# Altium PCB TLV3501.PcbDoc
Units mil, origin at the board's own origin, x right, y up, seen from the top; angles counter-clockwise.
Board outline 2825 x 2920 mil, 2 copper layers (Top Layer, Bottom Layer); 48 components, 22 nets, 121 pads, 235 vias.
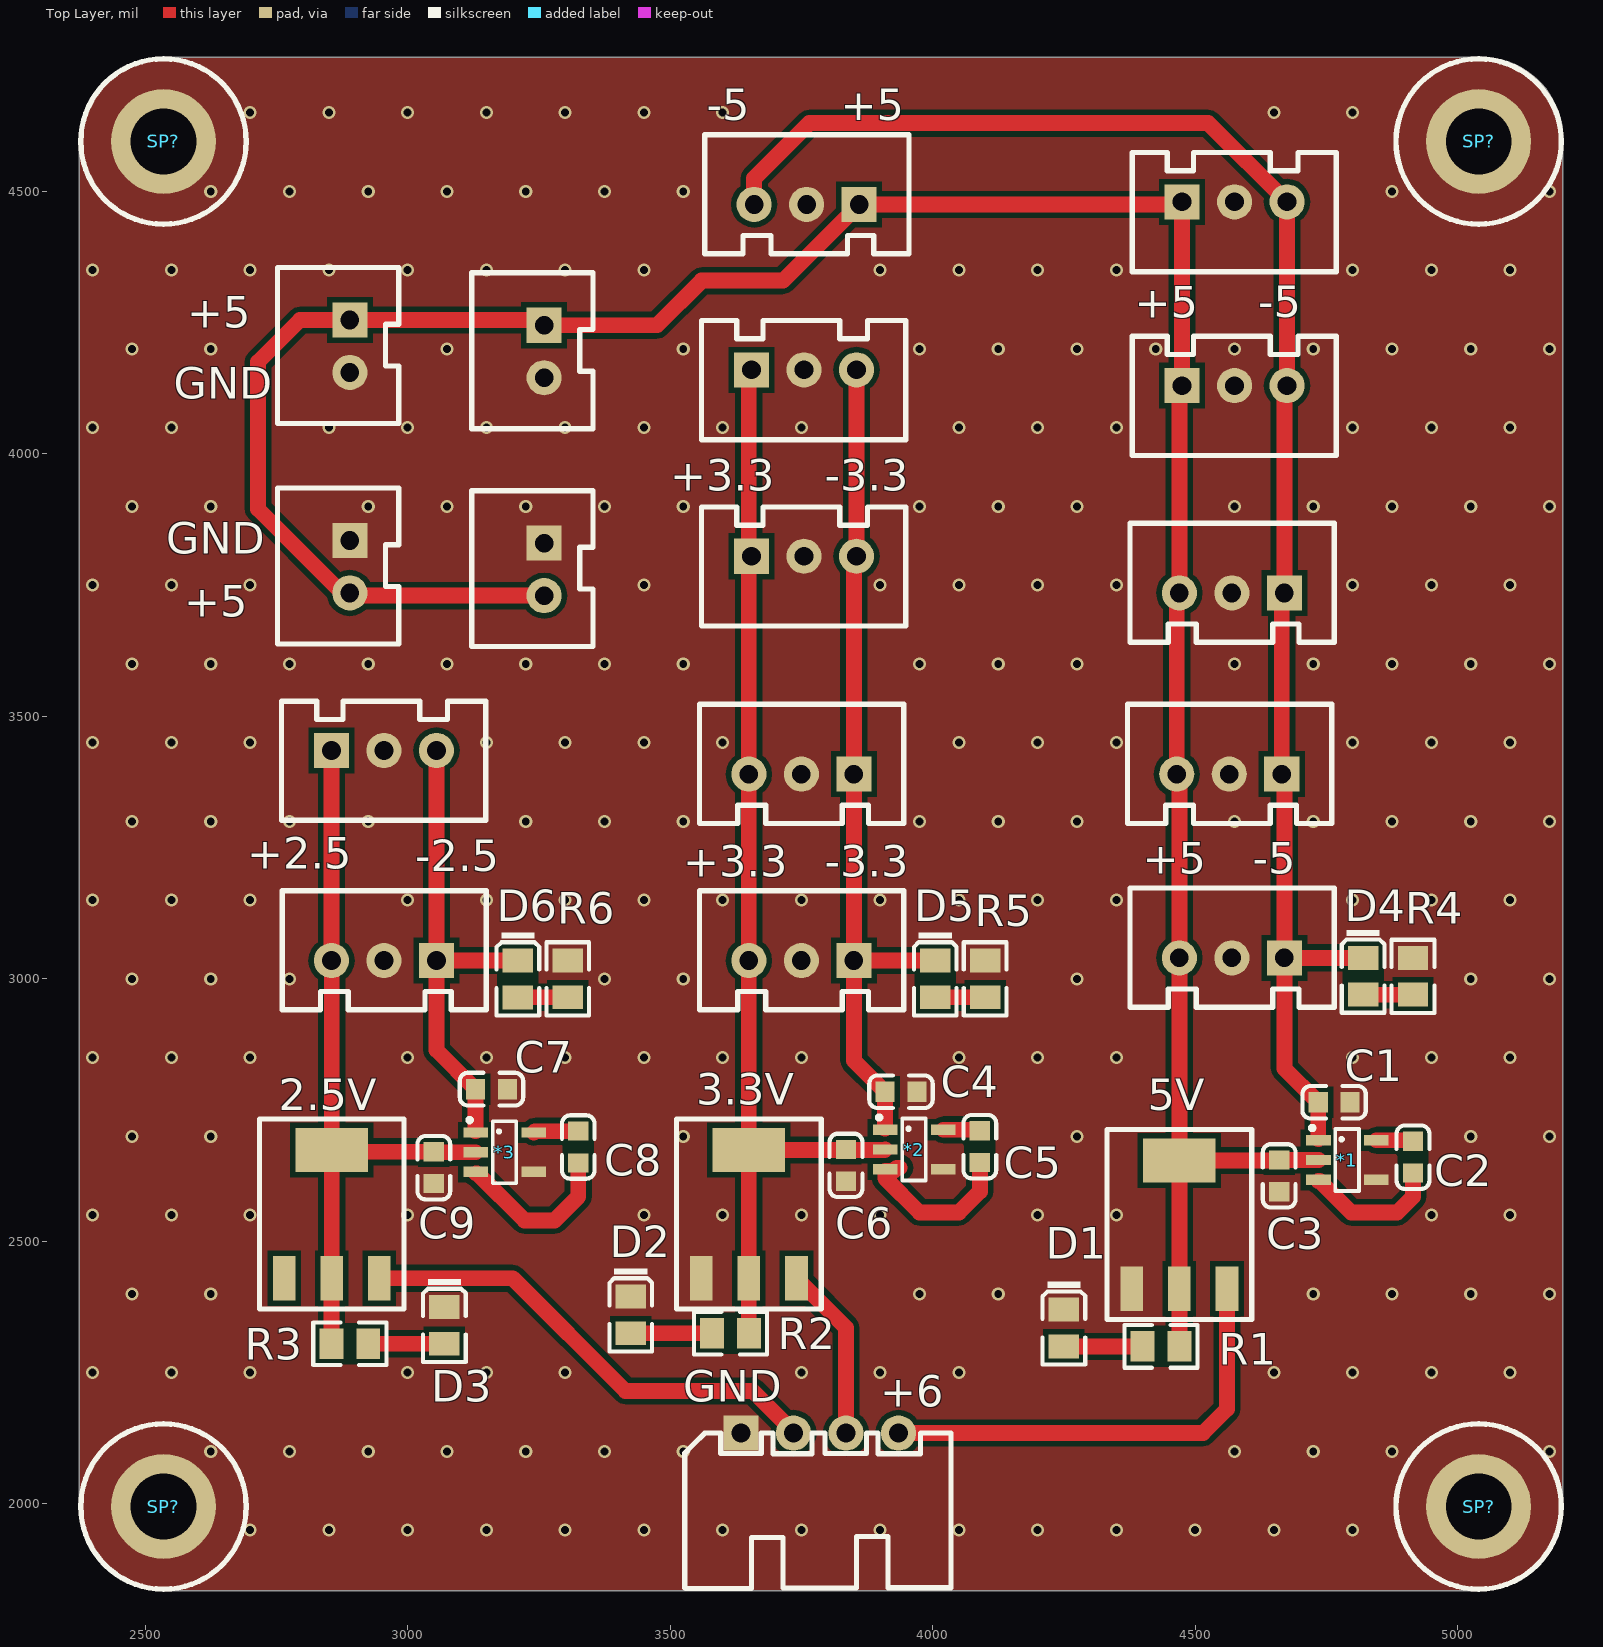
[diagram p0: Top Layer view]
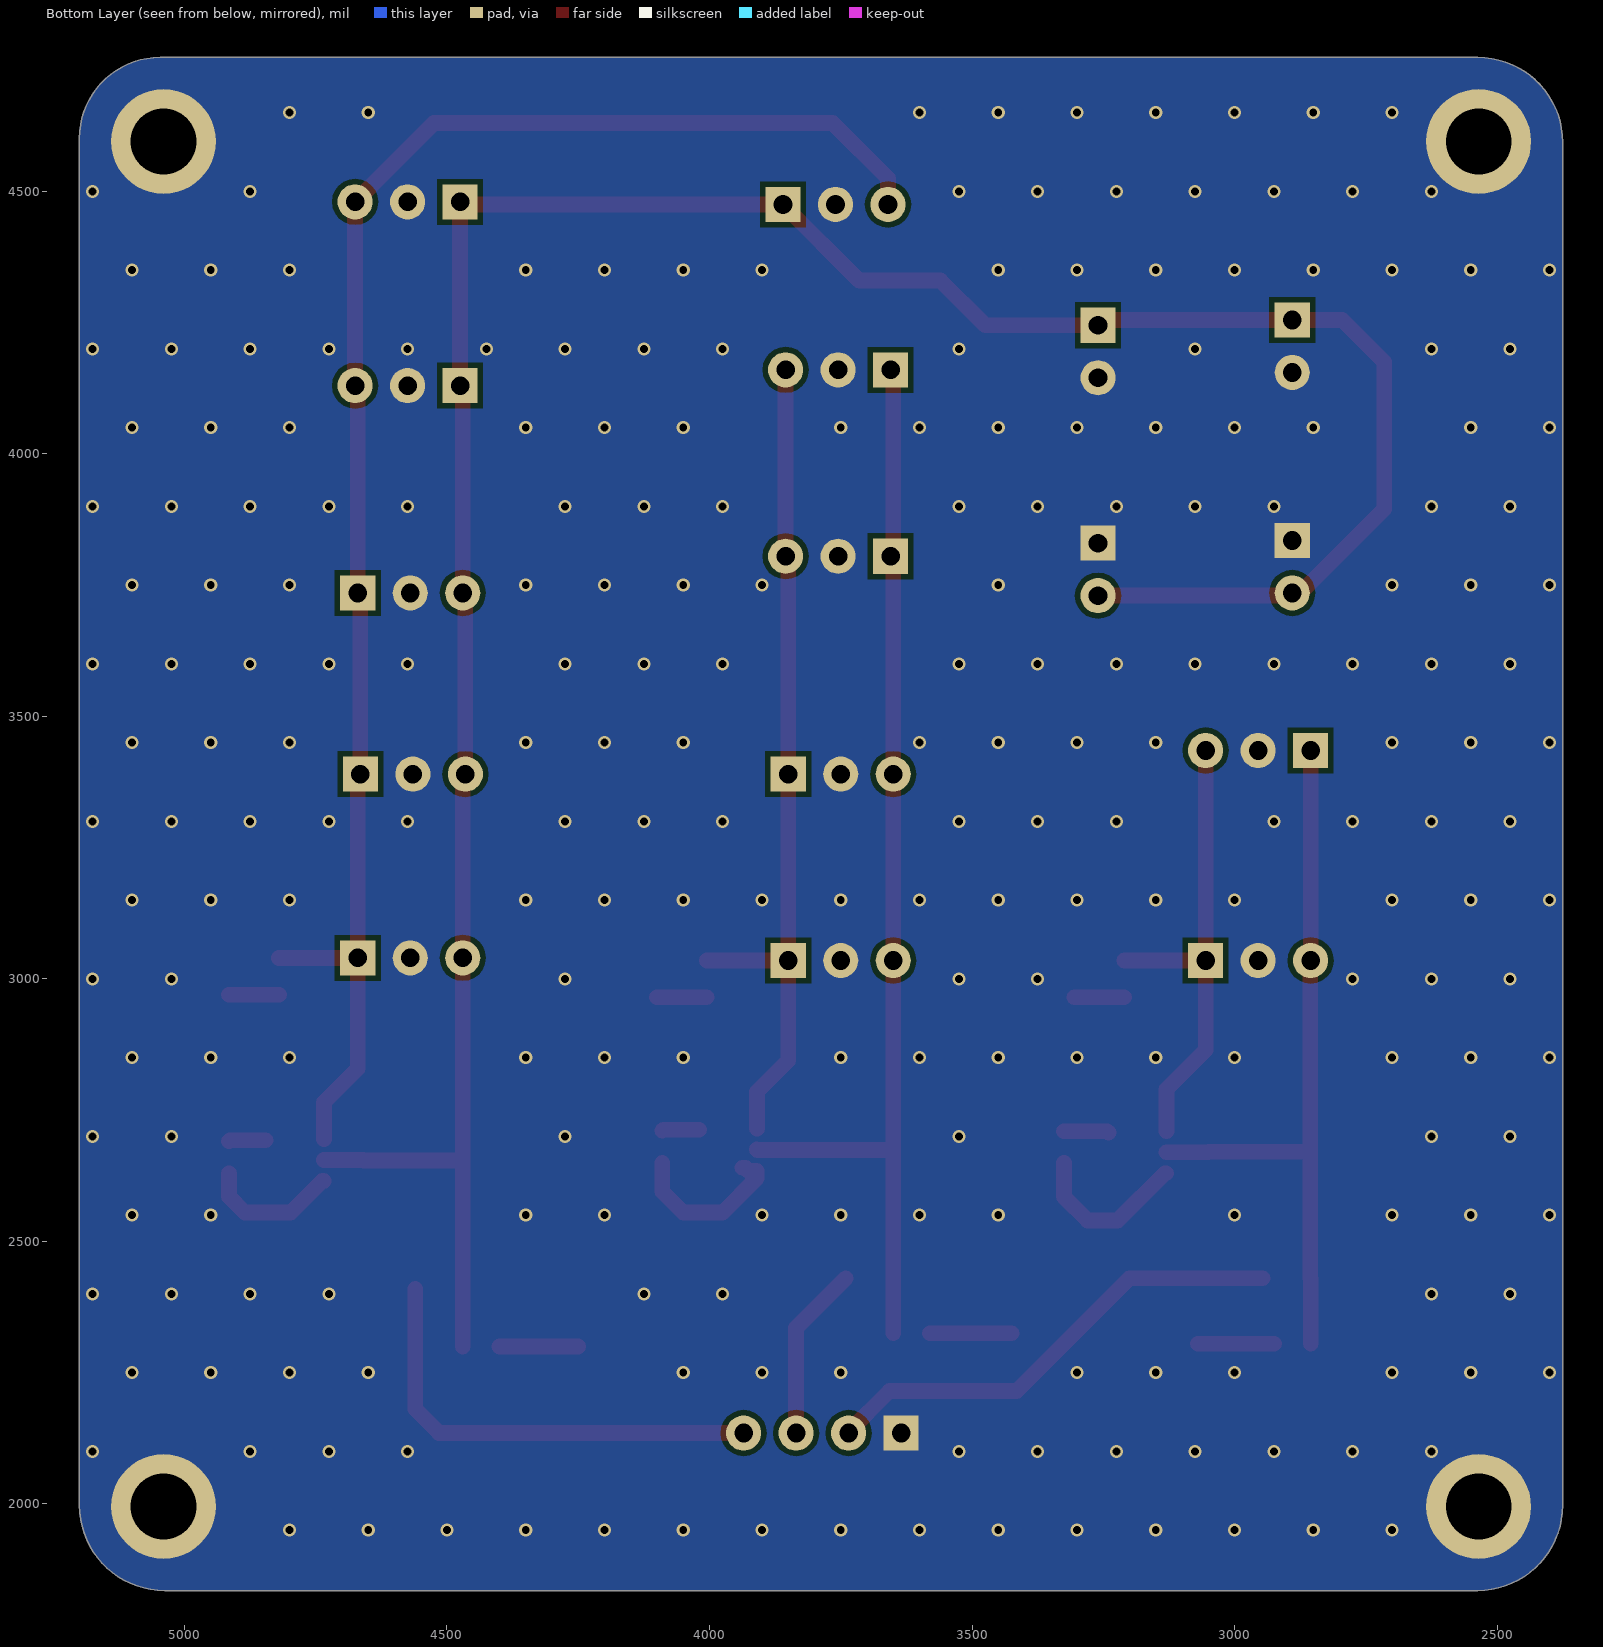
[diagram p1: Bottom Layer view, seen from below]
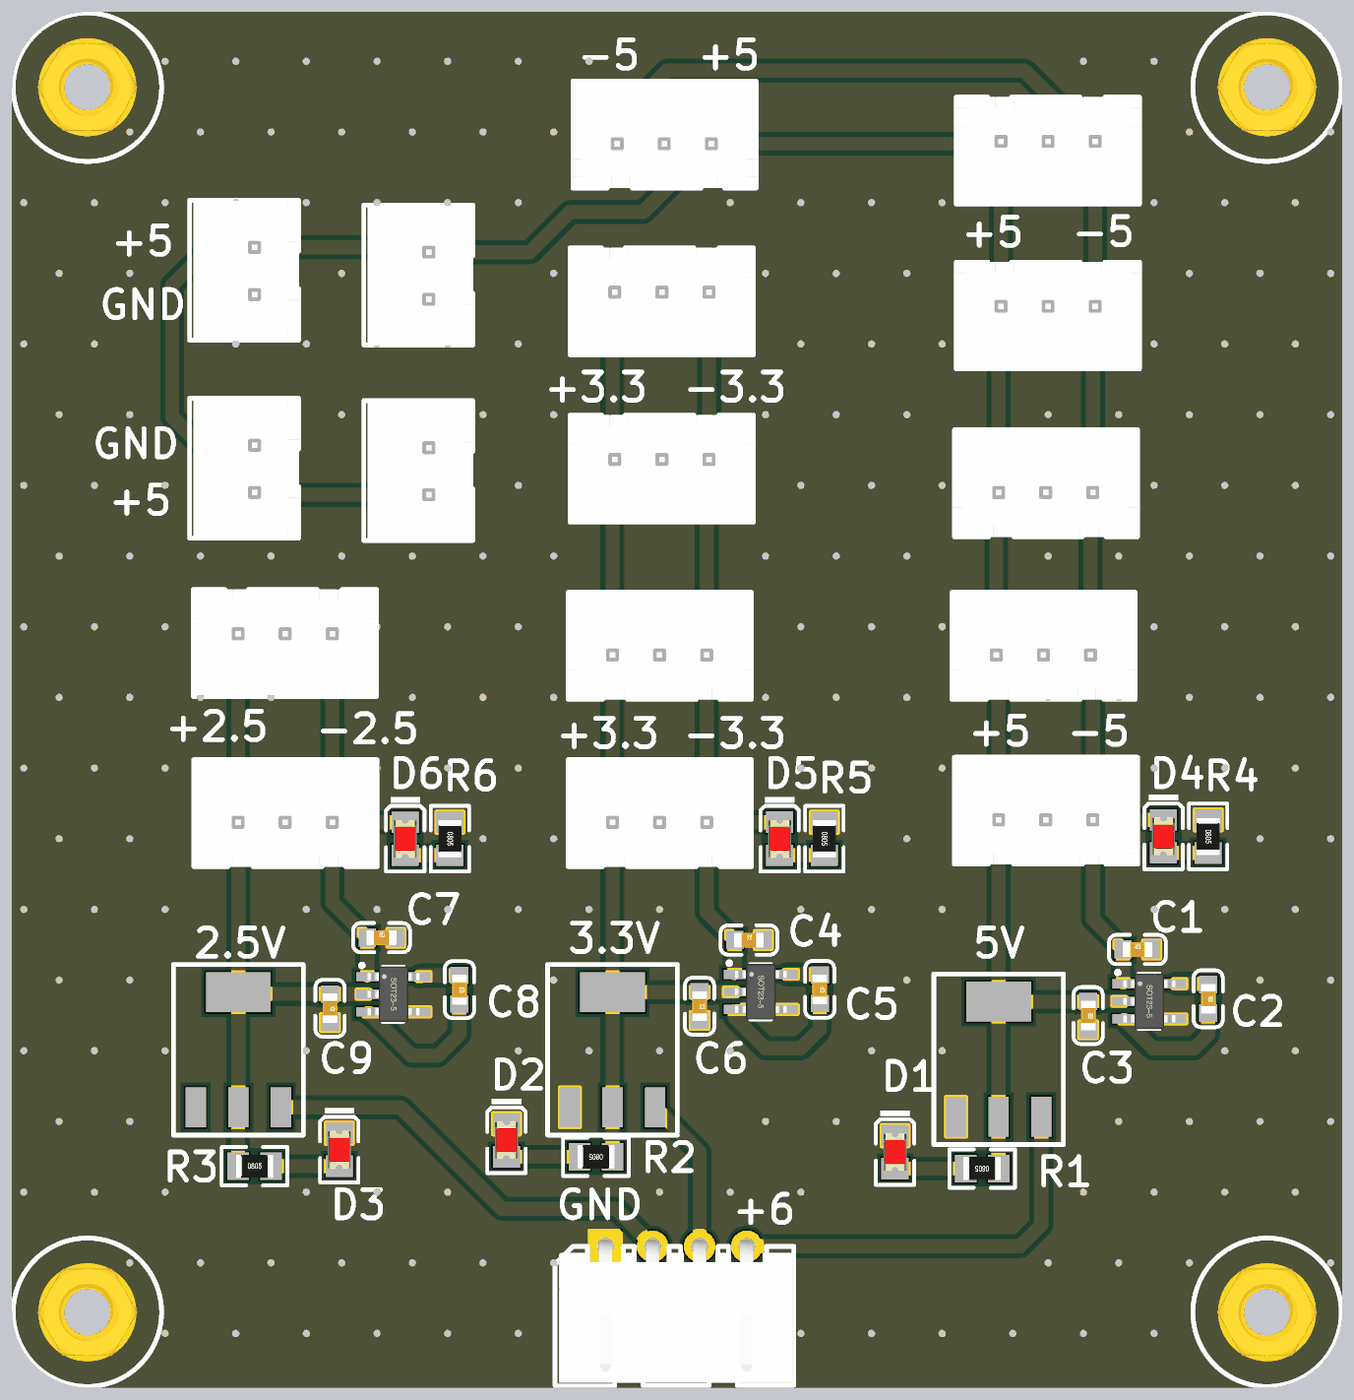
[diagram p2: 3D render of the assembled board from above, using the file's embedded part models]

## Layer stack, top to bottom
Top Solder: solder mask 0.4, Solder Resist, Dk 3.5
Top Layer: signal copper 1.4
Dielectric 1: dielectric 12.6, FR-4, Dk 4.8
Bottom Layer: signal copper 1.4
Bottom Solder: solder mask 0.4, Solder Resist, Dk 3.5

## Board outline
2375,1997.08 2375,4593.67 cw(c2536.33,4593.67) 2536.33,4755 5046.36,4755 cw(c5046.36,4601.36) 5200,4601.36 5200,1997.08 cw(c5037.92,1997.08) 5037.92,1835 2537.08,1835 cw(c2537.08,1997.08)

## Design rules (kind name [scope] priority, off if disabled: settings)
Clearance [All] p1: gap=10 ignorepadtopadclearanceinfootprint=FALSE except(0: Arc-Hole Track-Hole SMDPad-Hole THPad-Hole Via-Hole Fill-Hole Poly-Hole Region-Hole Text-Hole)
PolygonConnect [All] p1: connectstyle=Direct reliefconductorwidth=10 reliefentries=4 polygonreliefangle="90 Angle" airgapwidth=10
RoutingVias [All] p1: holewidth=28 width=50 viastyle="Through Hole" minholewidth=28 minwidth=50 maxholewidth=28 maxwidth=50
SolderMaskExpansion [All] p1: expansion=4
Width [All] p1: maxlimit=50 minlimit=10 preferedwidth=10 minimp=50.000000 maximp=50.000000 favimp=50.000000
30 further rules are at their usual default settings.

## Classes and differential pairs
component class Sheet1: 2.5V 3.3V 5V *1 *2 *3 +2.5 +3.3 +5 -2.5 -3.3 -5 C1 C2 C3 C4 C5 C6 C7 C8 C9 D1 D2 D3 D4 D5 D6 GND R1 R2 R3 R4 R5 R6 SP?

## Components (designator, comment, footprint, x,y, rotation, side; value= is the part's Value field where it differs from the comment)
2.5V "LM1117" 1117 2765,2430 r0 top (schematic designator U3)
3.3V "LM1117" 1117 3559.45,2430 r0 top (schematic designator U2)
5V "LM1117" 1117 4379.45,2410 r0 top (schematic designator U1)
*1 "Component_1" SOT23-5N 4790,2655 r270 top
*2 "Component_1" SOT23-5N 3965,2675 r270 top
*3 "Component_1" SOT23-5N 3185,2670 r270 top
+2.5 "HDR-1X3" XH2.54-LI-3P 2955,3035 r180 top (schematic designator JP16)
+3.3 "HDR-1X3" XH2.54-LI-3P 3755,3805 r0 top (schematic designator JP11)
+3.3 "HDR-1X3" XH2.54-LI-3P 3750,3035 r180 top (schematic designator JP3)
+5 "HDR-1X3" XH2.54-LI-3P 4570,3040 r180 top (schematic designator JP14)
+5 "HDR-1X3" XH2.54-LI-3P 4575,4130 r0 top (schematic designator JP9)
+5 "HDR-1X2" XH2.54-LI-2P 2890,4205 r270 top (schematic designator JP6)
+5 "HDR-1X2" XH2.54-LI-2P 2890,3785 r270 top (schematic designator JP5)
+5 "HDR-1X3" XH2.54-LI-3P 3755,4160 r0 top (schematic designator JP4)
-2.5 "HDR-1X3" XH2.54-LI-3P 2955,3435 r0 top (schematic designator JP17)
-3.3 "HDR-1X3" XH2.54-LI-3P 3750,3390 r180 top (schematic designator JP10)
-3.3 "HDR-1X3" XH2.54-LI-3P 4575,4480 r0 top (schematic designator JP2)
-5 "HDR-1X3" XH2.54-LI-3P 3760,4475 r180 top (schematic designator JP15)
-5 "HDR-1X3" XH2.54-LI-3P 4565,3390 r180 top (schematic designator JP8)
-5 "HDR-1X3" XH2.54-LI-3P 4570,3735 r180 top (schematic designator JP1)
C1 "6pF (6R0) 0.25pF 50V" 0603_C 4764.69,2765 r0 top
C2 "6pF (6R0) 0.25pF 50V" 0603_C 4915,2660.32 r270 top
C3 "(6R0) 0.25pF 50V" 0603_C 4660,2624.68 r270 top
C4 "6pF (6R0) 0.25pF 50V" 0603_C 3939.68,2785 r0 top
C5 "6pF (6R0) 0.25pF 50V" 0603_C 4090,2680.32 r270 top
C6 "(6R0) 0.25pF 50V" 0603_C 3835,2644.68 r270 top
C7 "6pF (6R0) 0.25pF 50V" 0603_C 3159.68,2790 r0 top
C8 "6pF (6R0) 0.25pF 50V" 0603_C 3325,2679.68 r270 top
C9 "(6R0) 0.25pF 50V" 0603_C 3050,2640.32 r270 top
D1 "黄灯 0805" 0805_LED_S1 4250,2334.96 r270 top
D2 "黄灯 0805" 0805_LED_S1 3425,2360.04 r270 top
D3 "黄灯 0805" 0805_LED_S1 3070,2340.04 r270 top
D4 "黄灯 0805" 0805_LED_S1 4820,3005.04 r270 top
D5 "黄灯 0805" 0805_LED_S1 4005,3000.04 r270 top
D6 "黄灯 0805" 0805_LED_S1 3210,2999.96 r270 top
GND "HDR-1X2" XH2.54-LI-2P 3260,4195 r270 top (schematic designator JP13)
GND "HDR-1X2" XH2.54-LI-2P 3260,3780 r270 top (schematic designator JP12)
GND "HDR-1X4" XH2.54-WI-4P 3785,2135 r0 top (schematic designator JP7)
R1 "1.8KΩ (1801) ±1%" 0805_R 4435.04,2300 r180 top
R2 "1.8KΩ (1801) ±1%" 0805_R 3615.04,2325 r180 top
R3 "1.8KΩ (1801) ±1%" 0805_R 2889.96,2305 r0 top
R4 "1.8KΩ (1801) ±1%" 0805_R 4915,3004.96 r270 top
R5 "1.8KΩ (1801) ±1%" 0805_R 4100,3000.04 r270 top
R6 "1.8KΩ (1801) ±1%" 0805_R 3305,3000.04 r270 top
SP? "M3铜柱" M3x4_L 5040,4595 r0 top
SP? "M3铜柱" M3x4_L 5040,1995 r0 top
SP? "M3铜柱" M3x4_L 2535,4595 r0 top
SP? "M3铜柱" M3x4_L 2535,1995 r0 top

## Footprints (in the part's own frame and the unit in brackets; to place one, negate y for a bottom-side part, rotate by r counter-clockwise, add the part's x,y. Pads: shape width x height; smd on the part's side, far side on the other; paste and mask are expansions set on the pad)
0603_C [mm]
  rect 0.93x0.98 smd: 1(-0.77,0) 2(0.77,0)
  silkscreen extent -1.53,-0.79 1.54,0.79, body extent -0.8,-0.4 0.8,0.4, height 0.3
0805_LED_S1 [mm]
  rect 1.16x1.47 smd: A(0.89,0) K(-0.89,0)
  silkscreen extent -2.25,-1.04 1.77,1.03, body extent -1.01,-0.62 1.01,0.62, height 1.1
0805_R [mm]
  rect 1.16x1.47 smd: 1(-0.89,0) 2(0.89,0)
  silkscreen extent -1.77,-1.04 1.77,1.03, body extent -1,-0.62 1,0.63, height 0.49
1117 [mm]
  rect 1.1x2.15 smd: 1(0,0) 2(2.3,0) 3(4.6,0)
  rect 3.5x2.15 smd: 2(2.3,6.2)
  silkscreen extent -1.2,-1.5 5.8,7.7
M3x4_L [mil] "M3铜柱，长：4mm"
  round 200 hole 125: 1(0,0)
  silkscreen extent -157,-157 157,157, body extent -106,-93 106,93, height 159
SOT23-5N [mm] "3x1.6x1.1mm(长宽高)"
  rect 0.5x1.2 smd: 1(-0.95,-1.4) 2(0,-1.4) 3(0.95,-1.4) 4(0.95,1.4) 5(-0.95,1.4)
  silkscreen extent -1.63,-1.78 1.5,0.56, body extent -1.5,-1.4 1.5,1.4, height 1.15
XH2.54-LI-2P [mm] "接插件，2P"
  rect 1.7x1.7 hole 0.9: 1(-1.27,0)
  round 1.7 hole 0.9: 2(1.27,0)
  silkscreen extent -3.81,-3.51 3.74,2.37, body extent -3.77,-3.3 3.77,2.4, height 7.05
XH2.54-LI-3P [mm] "接插件，3P"
  rect 1.7x1.7 hole 0.9: 1(-2.54,0)
  round 1.7 hole 0.9: 2(0,0) 3(2.54,0)
  silkscreen extent -4.95,-3.38 4.93,2.39, body extent -5.04,-3.3 5.04,2.4, height 7.03
XH2.54-WI-4P [mm] "接插件，4P"
  rect 1.7x1.7 hole 0.9: 1(-3.81,0)
  round 1.7 hole 0.9: 2(-1.27,0) 3(1.27,0) 4(3.81,0)
  silkscreen extent -6.53,-7.53 6.35,0, body extent -6.31,-7.35 6.31,0.35, height 5.73

## Part data
2.5V 3.3V 5V: "TI"
+2.5 +3.3 +3.3 +5 +5 +5 -2.5 -3.3 -3.3 -5 -5 -5: library part "Header 3", "3P接插件", BOM名称=3P接
+5 +5 GND GND: library part "Header 2", "2P接插件", BOM名称=2P接
C1 C2 C3 C4 C5 C6 C7 C8 C9: library part "0603 6pF (6R0) 0.25pF 50V", "贴片电容", Package=0603, SuppliersPartNumber=C37474, ComponentLink1Description=供应商, ComponentLink1URL=http://www.szlcsc.com/product/details_38453.html, Supplier=LC
D1 D2 D3 D4 D5 D6: library part "0805 黄灯", "发光二极管", Package=0805, SuppliersPartNumber=C2296, ComponentLink1Description=供应商, ComponentLink1URL=http://www.szlcsc.com/product/details_2669.html, Supplier=LC
GND: library part "Header 4", "4P接插件", BOM名称=4P接
R1 R2 R3 R4 R5 R6: library part "0805 1.8KΩ (1801) 1%", "贴片电阻", Package=0805, SuppliersPartNumber=C17398, ComponentLink1Description=供应商, ComponentLink1URL=http://www.szlcsc.com/product/details_18086.html, Supplier=LC
SP? SP? SP? SP?: library part 铜柱小焊盘, "铜柱"

## Via types
v1: diameter 25, hole 15, Top Layer to Bottom Layer, tented both sides, 235 vias

## Nets (pads, with @x,y where several pads share a name; then routed paths per layer and width w, separated by ;. In a path a pad name is that pad's centre, name@x,y a point inside that pad or via, vN(x,y) a via of type N, cw(c..) or ccw(c..) an arc to the next point about the centre after c; other vN are vias at no path point)
+2.5: 2.5V.2 *3.2 +2.5.3 -2.5.1 C9.1 R3.1 | length 1406.5
  Top Layer w30: R3.1 2854.92,2429.37 2855.55,2430 2.5V.2@2855.55,2674.09 ; -2.5.1 +2.5.3 2855.55,3034.45 2.5V.2@2855.55,2674.09 ; *3.2 3050.63,2670 C9.1 2859.02,2670.63 2.5V.2@2855.55,2674.09
+3.3: 3.3V.2 *2.2 +3.3.1@3655,3805 +3.3.3@3650,3035 +5.1@3655,4160 -3.3.3@3650,3390 C6.1 R2.1 | length 2097.4
  Top Layer w30: R2.1 3650,2325.08 3650,2430 3.3V.2@3650,2674.09 ; +5.1@3655,4160 3650,4155 3650,3390 3650,3035 3.3V.2@3650,2674.09 ; *2.2 3908.98,2674.09 3.3V.2@3650,2674.09
+3.5: 2.5V.3 GND.2@3735,2135 | length 912.4
  Top Layer w30: 2.5V.3 3200,2430 3415,2215 3657.28,2215 3735,2137.28 GND.2@3735,2135
+4.3: 3.3V.3 GND.3 | length 334.1
  Top Layer w30: 3.3V.3 3835,2335.55 GND.3
+5: 5V.2 *1.2 +5.1@2890,4255 +5.1@4475,4130 +5.2@2890,3735 +5.3@4470,3040 -3.3.1@4475,4480 -5.1@3860,4475 -5.3@4465,3390 -5.3@4470,3735 C3.1 GND.1@3260,4245 GND.2@3260,3730 R1.1 | length 5239.5
  Top Layer w30: GND.2@3260,3730 2895,3730 2890,3735 2875,3735 2715,3895 2715,4175 2795,4255 2890,4255 3250,4255 3260,4245 3475,4245 3560,4330 3715,4330 3860,4475 4470,4475 4475,4480 4475,4130 4470,4125 4470,3735 4465,3730 4465,3390 4470,3385 4470,3040 5V.2@4470,2654.09 ; R1.1 4470,2300.08 4470,2410 5V.2@4470,2654.09 ; *1.2 C3.1 4659.1,2654.09 5V.2@4470,2654.09
+6: 5V.3 GND.4 | length 873.9
  Top Layer w30: GND.4 4515,2135 4560.55,2180.55 5V.3
-2.5: *3.1 +2.5.1 -2.5.3 C7.1 D6.K | length 911.3
  Top Layer w30: -2.5.3 +2.5.1 ; *3.1@3129.88,2710 3129.37,2710 C7.1 3055,2864.37 +2.5.1 ; D6.K +2.5.1
-3.3: *2.1 +3.3.1@3850,3035 +3.3.3@3855,3805 +5.3@3855,4160 -3.3.1@3850,3390 C4.1 D5.K | length 1627.1
  Top Layer w30: +5.3@3855,4160 3855,3805 3850,3800 3850,3390 +3.3.1@3850,3035 ; *2.1@3908.98,2715 3909.37,2715 C4.1 3850,2844.37 +3.3.1@3850,3035 ; D5.K 4004.92,3035 +3.3.1@3850,3035
-5: *1.1 +5.1@4670,3040 +5.3@4675,4130 -3.3.3@4675,4480 -5.1@4665,3390 -5.1@4670,3735 -5.3@3660,4475 C1.1 D4.K | length 3139
  Top Layer w30: -5.3@3660,4475 3660,4525 3765,4630 4525,4630 4675,4480 4675,4130 4670,4125 4670,3735 4665,3730 4665,3390 4670,3385 +5.1@4670,3040 ; *1.1@4734.88,2695 4734.37,2695 C1.1 4670,2829.37 +5.1@4670,3040 ; D4.K 4819.92,3040 +5.1@4670,3040
GND: 3.3V.1 5V.1 *1.4 *2.4 *3.4 +2.5.2 +3.3.2 +5.1@2890,3835 +5.2@2890,4155 +5.2@3755,4160 +5.2@4570,3040 +5.2@4575,4130 -2.5.2 -3.3.2 -5.2 C1.2 C3.2 C4.2 C6.2 C7.2 C9.2 D1.K D2.K D3.K GND.1@3260,3830 GND.1@3635,2135 GND.2@3260,4145 R4.1 R5.1 R6.1 SP?.1
  other v1: 2700,1950 2850,1950 3000,1950 3150,1950 3300,1950 3450,1950 3600,1950 3750,1950 3900,1950 4050,1950 4200,1950 4350,1950 4500,1950 4650,1950 4800,1950 2625,2100 2775,2100 2925,2100 3075,2100 3225,2100 3375,2100 3525,2100 4575,2100 4725,2100 4875,2100 5175,2100 2400,2250 2550,2250 2700,2250 3000,2250 3150,2250 3300,2250 3750,2250 3900,2250 4050,2250 4650,2250 4800,2250 4950,2250 5100,2250 2475,2400 2625,2400 3975,2400 4125,2400 4725,2400 4875,2400 5025,2400 5175,2400 2400,2550 2550,2550 2700,2550 3000,2550 3450,2550 3600,2550 3750,2550 3900,2550 4200,2550 4350,2550 4950,2550 5100,2550 2475,2700 2625,2700 3525,2700 4275,2700 5025,2700 5175,2700 2400,2850 2550,2850 2700,2850 3000,2850 3150,2850 3300,2850 3450,2850 3600,2850 3750,2850 4050,2850 4200,2850 4350,2850 4800,2850 4950,2850 5100,2850 2475,3000 2625,3000 2775,3000 3375,3000 3525,3000 4275,3000 5025,3000 5175,3000 2400,3150 2550,3150 2700,3150 3000,3150 3150,3150 3300,3150 3450,3150 3600,3150 3750,3150 3900,3150 4050,3150 4200,3150 4350,3150 4800,3150 4950,3150 5100,3150 2475,3300 2625,3300 2775,3300 2925,3300 3225,3300 3375,3300 3525,3300 3975,3300 4125,3300 4275,3300 4575,3300 4725,3300 4875,3300 5025,3300 5175,3300 2400,3450 2550,3450 2700,3450 3150,3450 3300,3450 3450,3450 3600,3450 4050,3450 4200,3450 4350,3450 4800,3450 4950,3450 5100,3450 2475,3600 2625,3600 2775,3600 2925,3600 3075,3600 3225,3600 3375,3600 3525,3600 3975,3600 4125,3600 4275,3600 4575,3600 4725,3600 4875,3600 5025,3600 5175,3600 2400,3750 2550,3750 2700,3750 3450,3750 3900,3750 4050,3750 4200,3750 4350,3750 4800,3750 4950,3750 5100,3750 2475,3900 2625,3900 2925,3900 3075,3900 3225,3900 3375,3900 3525,3900 3975,3900 4125,3900 4275,3900 4575,3900 4725,3900 4875,3900 5025,3900 5175,3900 2400,4050 2550,4050 2850,4050 3000,4050 3150,4050 3300,4050 3450,4050 3600,4050 3750,4050 4050,4050 4200,4050 4350,4050 4800,4050 4950,4050 5100,4050 2475,4200 2625,4200 3075,4200 3525,4200 3975,4200 4125,4200 4275,4200 4425,4200 4575,4200 4725,4200 4875,4200 5025,4200 5175,4200 2400,4350 2550,4350 2700,4350 2850,4350 3000,4350 3150,4350 3300,4350 3450,4350 3900,4350 4050,4350 4200,4350 4350,4350 4800,4350 4950,4350 5100,4350 2625,4500 2775,4500 2925,4500 3075,4500 3225,4500 3375,4500 3525,4500 4875,4500 5175,4500 2700,4650 2850,4650 3000,4650 3150,4650 3300,4650 3450,4650 3600,4650 4650,4650 4800,4650
Net*1_3: *1.3 C2.2 | length 262.4
  Top Layer w30: *1.3@4734.88,2615 4737.48,2615 4797.48,2555 4885,2555 4915,2585 C2.2
Net*1_5: *1.5 C2.1 | length 70.6
  Top Layer w30: *1.5 4913.23,2692.4 C2.1
Net*2_3: *2.3 C5.2 | length 322.5
  Top Layer w30: 3937.26,2640.16 3931.61,2640.16 3925.55,2634.09 3909.88,2634.09 3909.88,2620.12 3975,2555 4050,2555 4090,2595 C5.2
Net*2_5: *2.5 C5.1 | length 70.6
  Top Layer w30: *2.5 4088.23,2712.4 C5.1
Net*3_3: *3.3 C8.2 | length 315.4
  Top Layer w30: *3.3@3129.88,2630 3132.48,2630 3222.48,2540 3280,2540 3325,2585 C8.2
Net*3_5: *3.5 C8.1 | length 86
  Top Layer w30: *3.5 3242.72,2710 C8.1
NetD1_A: D1.A R1.2 | length 150
  Top Layer w30: D1.A 4399.92,2299.92 R1.2
NetD2_A: D2.A R2.2 | length 155
  Top Layer w30: D2.A R2.2
NetD3_A: D3.A R3.2 | length 145
  Top Layer w30: R3.2 D3.A
NetD4_A: D4.A R4.2 | length 95
  Top Layer w30: D4.A 4914.92,2970 R4.2
NetD5_A: D5.A R5.2 | length 95
  Top Layer w30: D5.A R5.2
NetD6_A: D6.A R6.2 | length 95
  Top Layer w30: D6.A 3304.92,2964.92 R6.2
pads on no net: 2.5V.1

## Polygon pours and split planes (outlines as drawn)
GND on Top Layer "Top Layer-No Net" (solid, pour order 0): 2375,1997.08 2375,4593.67 cw(c2536.33,4593.67) 2536.33,4755 5046.36,4755 cw(c5046.36,4601.36) 5200,4601.36 5200,1997.08 cw(c5037.92,1997.08) 5037.92,1835 2537.08,1835 cw(c2537.08,1997.08)
GND on Bottom Layer "Top Layer-No Net1" (solid, pour order 1): 2375,1997.08 2375,4593.67 cw(c2536.33,4593.67) 2536.33,4755 5046.36,4755 cw(c5046.36,4601.36) 5200,4601.36 5200,1997.08 cw(c5037.92,1997.08) 5037.92,1835 2537.08,1835 cw(c2537.08,1997.08)

## Silkscreen, mask and mechanical layers (free items; w line width, h text height)
Top Overlay:
  text "+6" at 3900,2185 h60
Mechanical 1:
  lines w10: 2375,1997.08 ccw(c2537.08,1997.08) 2537.08,1835 5037.92,1835 ccw(c5037.92,1997.08) 5200,1997.08 5200,4601.36 ccw(c5046.36,4601.36) 5046.36,4755 3010,4755 2536.33,4755 ccw(c2536.33,4593.67) 2375,4593.67 2375,1997.08